# Altium PCB pocker_ shield_2.pcbdoc
Units mm, origin at the board's own origin, x right, y up, seen from the top; angles counter-clockwise.
Board outline 45 x 90.2 mm, 2 copper layers (Top Layer, Bottom Layer); 8 components, 29 nets, 96 pads, 24 vias.
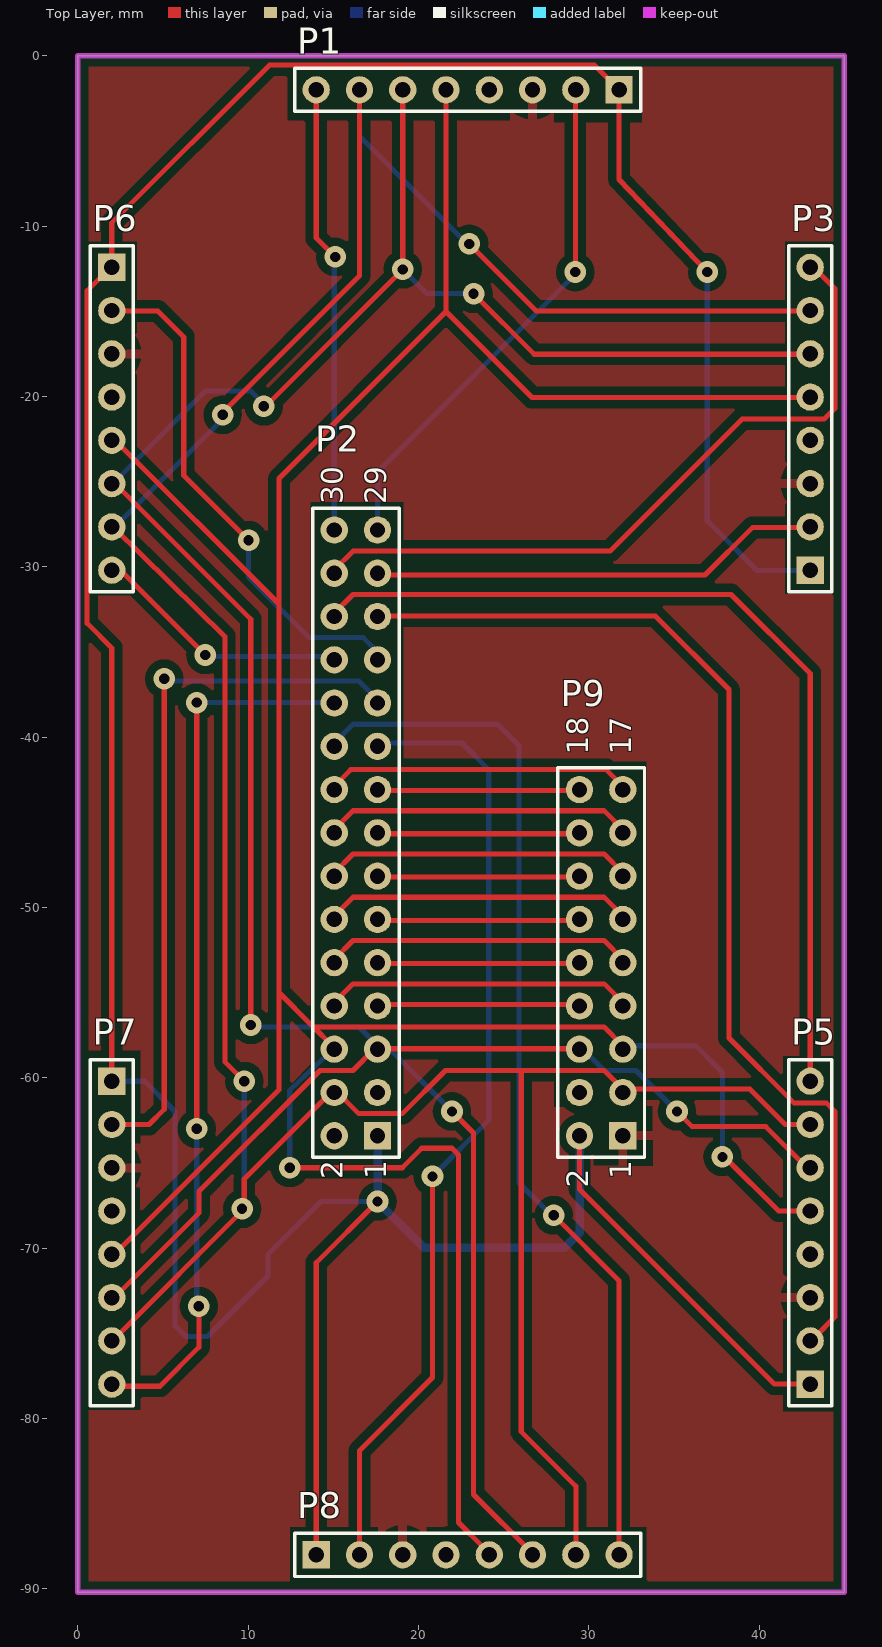
[diagram p0: Top Layer view]
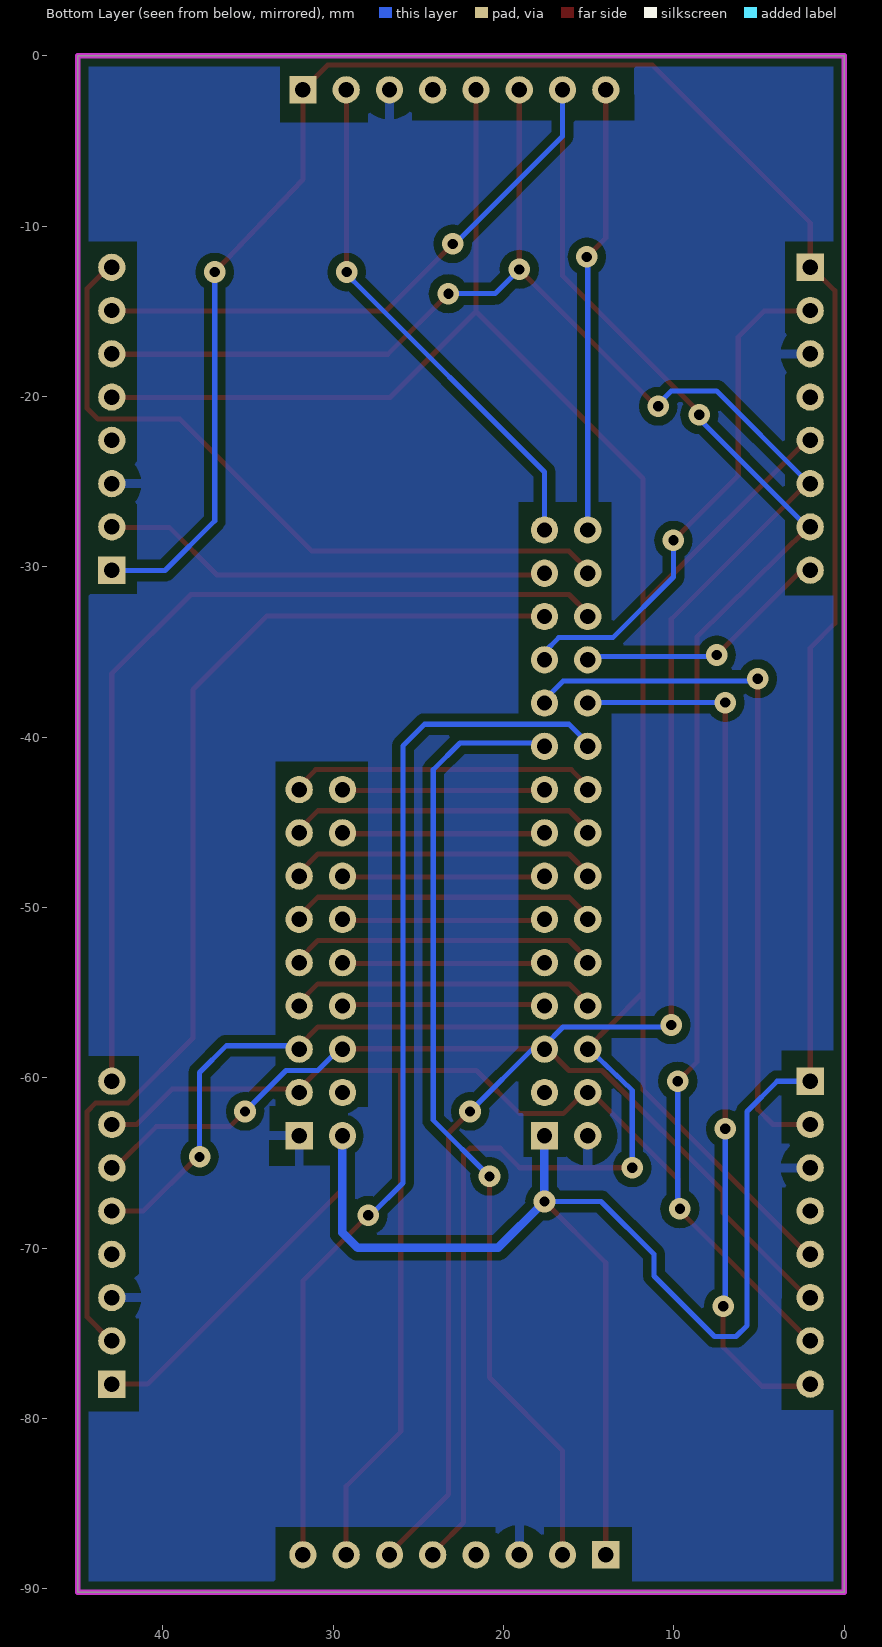
[diagram p1: Bottom Layer view, seen from below]

## Layer stack, top to bottom
Top Solder: solder mask 0.0102, Solder Resist, Dk 3.5
Top Layer: signal copper 0.0356
Dielectric 1: dielectric 0.32, FR-4, Dk 4.8
Bottom Layer: signal copper 0.0356
Bottom Solder: solder mask 0.0102, Solder Resist, Dk 3.5

## Board outline
0,-90.2 0,0 45,0 45,-90.2

## Design rules (kind name [scope] priority, off if disabled: settings)
Clearance [All] p1: gap=0.2
PlaneClearance [All] p1: clearance=0.5
PlaneConnect [All] p1: planeconnectstyle=Relief reliefexpansion=0.508 reliefentries=4 reliefconductorwidth=0.5 reliefairgap=0.5
PolygonConnect [All] p1: connectstyle=Relief reliefconductorwidth=0.5 reliefentries=4 polygonreliefangle="90 Angle" airgapwidth=1
RoutingVias [All] p1: holewidth=0.711 width=1.27 viastyle="Through Hole" minholewidth=0.711 minwidth=1.27 maxholewidth=0.711 maxwidth=1.27
SolderMaskExpansion [All] p1: expansion=0.102
Width [All] p1: maxlimit=0.5 minlimit=0.3 preferedwidth=0.3
27 further rules are at their usual default settings.

## Components (designator, comment, footprint, x,y, rotation, side; value= is the part's Value field where it differs from the comment)
P1 "Header 8" HDR1X8 31.78,-2 r180 top locked
P2 "Header 15X2" HDR2X15 17.6,-63.4 r90 top locked
P3 "Header 8" HDR1X8 43,-30.2 r90 top locked
P5 "Header 8" HDR1X8 43,-77.98 r90 top locked
P6 "Header 8" HDR1X8 2,-12.42 r270 top locked
P7 "Header 8" HDR1X8 2,-60.2 r270 top locked
P8 "Header 8" HDR1X8 14,-88 r0 top locked
P9 "Header 9X2" HDR2X9 32,-63.4 r90 top locked

## Footprints (in the part's own frame and the unit in brackets; to place one, negate y for a bottom-side part, rotate by r counter-clockwise, add the part's x,y. Pads: shape width x height; smd on the part's side, far side on the other; paste and mask are expansions set on the pad)
HDR1X8 [mm] "Connector; Header; 8 Position"
  rect 1.6x1.6 hole 0.9: 1(0,0)
  round 1.6 hole 0.9: 2(2.54,0) 3(5.08,0) 4(7.62,0) 5(10.16,0) 6(12.7,0) 7(15.24,0) 8(17.78,0)
  silkscreen extent -1.27,-1.27 19.05,1.27
HDR2X9 [mm] "Connector; Header; 9x2 Position"
  rect 1.6x1.6 hole 0.9: 1(0,0)
  round 1.6 hole 0.9: 2(0,2.54) 3(2.54,0) 4(2.54,2.54) 5(5.08,0) 6(5.08,2.54) 7(7.62,0) 8(7.62,2.54) 9(10.16,0) 10(10.16,2.54) 11(12.7,0) 12(12.7,2.54) 13(15.24,0) 14(15.24,2.54) 15(17.78,0) 16(17.78,2.54) 17(20.32,0) 18(20.32,2.54)
  silkscreen extent -1.27,-1.27 21.59,3.81
HDR2X15 [mm] "Connector; Header; 15x2 Position"
  rect 1.6x1.6 hole 0.9: 1(0,0)
  round 1.6 hole 0.9: 2(0,2.54) 3(2.54,0) 4(2.54,2.54) 5(5.08,0) 6(5.08,2.54) 7(7.62,0) 8(7.62,2.54) 9(10.16,0) 10(10.16,2.54) 11(12.7,0) 12(12.7,2.54) 13(15.24,0) 14(15.24,2.54) 15(17.78,0) 16(17.78,2.54) 17(20.32,0) 18(20.32,2.54) 19(22.86,0) 20(22.86,2.54) 21(25.4,0) 22(25.4,2.54) 23(27.94,0) 24(27.94,2.54) 25(30.48,0) 26(30.48,2.54) 27(33.02,0) 28(33.02,2.54) 29(35.56,0) 30(35.56,2.54)
  silkscreen extent -1.27,-1.27 36.83,3.81

## Part data
P1 P3 P5 P6 P7 P8: "Header, 8-Pin"
P2: "Header, 15-Pin, Dual row"
P9: "Header, 9-Pin, Dual row"

## Via types
v1: diameter 1.27, hole 0.6, Top Layer to Bottom Layer, 24 vias

## Nets (pads, with @x,y where several pads share a name; then routed paths per layer and width w, separated by ;. In a path a pad name is that pad's centre, name@x,y a point inside that pad or via, vN(x,y) a via of type N, cw(c..) or ccw(c..) an arc to the next point about the centre after c; other vN are vias at no path point)
CS1: P2.8 P9.7 | length 17.8
  Top Layer w0.3: P2.8@15.06,-55.58 16.157,-54.483 30.903,-54.483 P9.7@32,-55.58
CS2: P2.10 P9.9 | length 17.8
  Top Layer w0.3: P2.10@15.06,-53.04 16.157,-51.943 30.903,-51.943 P9.9@32,-53.04
CS3: P2.12 P9.11 | length 17.9
  Top Layer w0.3: P2.12@15.06,-50.5 16.157,-49.403 30.903,-49.403 32,-50.5 P9.11@31.923,-50.5
CS4: P2.14 P9.13 | length 17.9
  Top Layer w0.3: P2.14@15.06,-47.96 16.157,-46.863 30.903,-46.863 32,-47.96 P9.13@31.923,-47.96
CS5: P2.16 P9.15 | length 17.8
  Top Layer w0.3: P2.16@15.06,-45.42 16.157,-44.323 30.903,-44.323 P9.15@32,-45.42
CS6: P2.18 P9.17 | length 17.7
  Top Layer w0.3: P2.18@15.06,-42.88 16.03,-41.91 31.03,-41.91 P9.17@32,-42.88
CS7: P2.20 P8.8 | length 62.2
  Top Layer w0.3: v1(27.94,-68.072) 31.78,-71.912 P8.8
  Bottom Layer w0.3: P2.20@15.06,-40.714 15.06,-40.34 16.157,-39.243 24.638,-39.243 25.908,-40.513 25.908,-66.167 27.813,-68.072 v1(27.94,-68.072)
CS8: P2.22 P7.8 | length 52.2
  Top Layer w0.3: P7.8@2,-77.78 2.325,-78.105 4.826,-78.105 7.112,-75.819 v1(7.112,-73.406) ; v1(6.985,-62.992) v1(6.985,-37.973)
  Bottom Layer w0.3: v1(6.985,-62.992) 6.985,-73.279 v1(7.112,-73.406) ; v1(6.985,-37.973) 14.887,-37.973 P2.22@15.06,-37.8
CS9: P2.24 P6.8 | length 15.2
  Top Layer w0.3: P6.8@2,-30 2.314,-30 v1(7.493,-35.179)
  Bottom Layer w0.3: v1(7.493,-35.179) 7.574,-35.26 P2.24@15.06,-35.26
CS10: P2.26 P5.8 | length 54
  Top Layer w0.3: P2.26@15.06,-32.72 16.157,-31.623 38.354,-31.623 43,-36.269 P5.8@43,-60
CS11: P2.28 P3.8 | length 42.4
  Top Layer w0.3: P2.28@15.06,-30.18 16.157,-29.083 31.242,-29.083 38.989,-21.336 43.815,-21.336 44.446,-20.705 44.446,-13.666 P3.8@43,-12.22
CS12: P1.8 P2.30 | length 26.2
  Top Layer w0.3: P1.8 14,-10.698 v1(15.113,-11.811)
  Bottom Layer w0.3: P2.30 v1@15.06,-11.864
GND: P1.3 P2.2 P3.3 P5.3 P6.3 P7.3 P8.3 P9.1
MISO: P1.5 P2.6 P3.5 P5.5 P6.5 P7.5 P8.5 P9.5 | length 198.2
  Top Layer w0.3: P7.5@2,-70.16 2.357,-70.16 11.811,-60.706 11.811,-24.825 21.62,-15.016 ; P6.5@2,-22.38 11.811,-32.191 ; 11.811,-54.991 13.716,-56.896 ; v1(12.446,-65.278) 19.05,-65.278 20.193,-64.135 21.971,-64.135 22.352,-64.516 22.352,-86.106 23.865,-87.619 P8.5@23.865,-88 ; P2.6@15.286,-58.12 14.94,-58.12 13.843,-57.023 30.903,-57.023 P9.5@32,-58.12 ; P1.5 21.62,-15.016 ; v1@37.973,-64.389 37.973,-64.643 41.148,-67.818 42.802,-67.818 P5.5@43,-67.62 ; P3.5@43,-19.84 42.774,-20.066 26.67,-20.066 21.62,-15.016
  Bottom Layer w0.3: v1(12.446,-65.278) 12.446,-60.734 15.12,-58.183 P2.6@15.187,-58.12 ; P9.5@32,-58.12 36.276,-58.12 37.846,-59.69 37.846,-64.262 v1@38.1,-64.516
  other v1: 37.846,-64.643
MOSI: P1.6 P2.5 P3.6 P5.6 P6.6 P7.6 P8.6 P9.6 | length 187.7
  Top Layer w0.3: P7.6@2,-72.7 2.357,-72.7 7.112,-67.945 7.112,-66.675 14.224,-59.563 16.157,-59.563 17.427,-58.293 29.287,-58.293 P9.6@29.46,-58.12 ; P6.6@2,-24.92 10.16,-33.08 v1@10.16,-57.023 ; v1@10.922,-20.701 v1(19.08,-12.543) P1.6 ; v1(21.971,-61.976) 23.241,-63.246 23.241,-84.455 26.7,-87.914 P8.6 ; v1(23.241,-13.97) 26.797,-17.526 42.774,-17.526 P3.6@43,-17.3 ; v1(35.179,-61.976) 36.068,-62.865 40.386,-62.865 42.601,-65.08 P5.6@43,-65.08
  Bottom Layer w0.3: P6.6@2,-24.92 2.258,-24.92 7.493,-19.685 10.16,-19.685 v1@11.049,-20.574 ; v1@10.16,-57.023 16.51,-57.023 17.6,-58.113 17.6,-58.12 18.115,-58.12 v1(21.971,-61.976) ; v1(19.08,-12.543) 20.507,-13.97 v1(23.241,-13.97) ; P9.6@29.46,-58.12 30.903,-59.563 32.766,-59.563 v1(35.179,-61.976)
  other v1: 10.16,-56.896 10.922,-20.574
RESET1: P2.7 P9.8 | length 11.9
  Top Layer w0.3: P2.7@17.6,-55.707 P9.8@29.464,-55.707
RESET2: P2.9 P9.10 | length 11.9
  Top Layer w0.3: P2.9@17.6,-53.294 P9.10@29.46,-53.294
RESET3: P2.11 P9.12 | length 11.9
  Top Layer w0.3: P2.11@17.727,-50.754 P9.12@29.591,-50.754
RESET4: P2.13 P9.14 | length 11.9
  Top Layer w0.3: P2.13@17.6,-48.214 P9.14@29.46,-48.214
RESET5: P2.15 P9.16 | length 11.9
  Top Layer w0.3: P2.15@17.727,-45.674 P9.16@29.587,-45.674
RESET6: P2.17 P9.18 | length 11.9
  Top Layer w0.3: P2.17@17.727,-43.134 P9.18@29.587,-43.134
RESET7: P2.19 P8.2 | length 56.4
  Top Layer w0.3: P8.2 16.54,-81.885 20.828,-77.597 v1(20.828,-65.786)
  Bottom Layer w0.3: P2.19@17.6,-40.34 22.56,-40.34 24.13,-41.91 24.13,-62.484 v1(20.828,-65.786)
RESET8: P2.21 P7.2 | length 41.8
  Top Layer w0.3: P7.2@2,-62.54 2.198,-62.738 4.191,-62.738 5.08,-61.849 v1(5.08,-36.576)
  Bottom Layer w0.3: v1(5.08,-36.576) 5.207,-36.703 16.503,-36.703 P2.21@17.6,-37.8
RESET9: P2.23 P6.2 | length 30.3
  Top Layer w0.3: P6.2@2,-14.76 2.226,-14.986 4.699,-14.986 6.223,-16.51 6.223,-24.638 v1(10.033,-28.448)
  Bottom Layer w0.3: v1(10.033,-28.448) 10.033,-30.607 13.589,-34.163 16.764,-34.163 17.6,-34.999 P2.23@17.6,-35.26
RESET10: P2.25 P5.2 | length 65
  Top Layer w0.3: P2.25@17.6,-32.72 17.773,-32.893 33.909,-32.893 38.227,-37.211 38.227,-57.658 42.037,-61.468 43.942,-61.468 44.446,-61.972 44.446,-74.045 43.251,-75.24 P5.2@43,-75.24
RESET11: P2.27 P3.2 | length 26.8
  Top Layer w0.3: P2.27@17.6,-30.18 17.9,-30.48 36.83,-30.48 39.624,-27.686 42.774,-27.686 P3.2@43,-27.46
RESET12: P1.2 P2.29 | length 30.5
  Top Layer w0.3: v1@28.829,-12.827 29.21,-12.446 29.21,-2.03 P1.2
  Bottom Layer w0.3: P2.29@17.6,-27.64 17.6,-24.437 28.829,-13.208 v1@28.829,-12.827
  other v1: 29.21,-12.7
SCK: P1.7 P2.4 P3.7 P5.7 P6.7 P7.7 P8.7 P9.3 | length 189
  Top Layer w0.3: P7.7@2,-75.24 2.23,-75.24 9.779,-67.691 9.779,-65.941 15.06,-60.66 16.503,-62.103 19.05,-62.103 21.59,-59.563 26.035,-59.563 ; P6.7@2.127,-27.714 8.636,-34.096 8.636,-59.055 v1@9.906,-60.325 ; v1@8.636,-21.082 8.636,-20.828 16.54,-12.924 P1.7 ; v1(22.987,-11.049) 26.924,-14.986 42.774,-14.986 P3.7@43,-14.76 ; P8.7 29.24,-83.977 26.035,-80.772 26.035,-59.563 ; P5.7@43,-62.54 42.802,-62.738 41.529,-62.738 39.451,-60.66 32,-60.66 30.903,-59.563 26.035,-59.563
  Bottom Layer w0.3: P6.7@2.127,-27.714 v1@8.571,-21.271 ; v1@9.779,-67.437 v1(9.779,-60.198) ; P1.7 16.54,-4.729 22.86,-11.049 v1(22.987,-11.049)
  other v1: 9.652,-67.691 8.509,-21.082
VDD+3.3V: P1.1 P2.1 P3.1 P5.1 P6.1 P7.1 P8.1 P9.2 | length 220.9
  Top Layer w0.3: P7.1@2,-60 2,-34.766 0.554,-33.32 0.554,-13.797 2,-12.351 2,-9.811 11.257,-0.554 30.334,-0.554 P1.1 31.78,-7.269 v1(36.957,-12.7) ; P8.1 14,-70.857 v1(17.6,-67.257) ; P9.2@29.46,-63.2 29.46,-66.544 40.894,-77.978 42.802,-77.978 P5.1@43,-77.78 ; P3.1@42.972,-29.972 P3.1@43,-30
  Bottom Layer w0.3: P7.1@2,-60 2.198,-60.198 3.937,-60.198 5.715,-61.976 5.715,-74.549 6.35,-75.184 7.62,-75.184 11.176,-71.628 11.176,-70.358 14.277,-67.257 v1(17.6,-67.257) ; v1(36.957,-12.7) 36.957,-27.305 39.878,-30.226 42.774,-30.226 P3.1@43,-30
  Bottom Layer w0.5: P2.1@17.6,-63.2 v1(17.6,-67.257) 20.32,-69.977 28.575,-69.977 29.46,-69.092 P9.2@29.46,-63.2
pads on no net: P1.4 P2.3 P3.4 P5.4 P6.4 P7.4 P8.4 P9.4
copper on no net: | length 0.5
  Top Layer w0.3: 29.46,-60.66 29.926,-60.66

## Polygon pours and split planes (outlines as drawn)
GND on Bottom Layer "Bottom Layer-No Net" (solid, pour order 4): 0,0 45,0 45,-90.2 0,-90.2
GND on Top Layer "Bottom Layer-No Net" (solid, pour order 6): 0,0 45,0 45,-90.2 0,-90.2

## Keep-outs
Keep-Out Layer:
  the board outline again, w0.3

## Other copper
Multi-Layer:
  pour cut-out: 27.94,-41.402 33.401,-41.402 33.401,-61.722 27.94,-61.722
  pour cut-out: 12.446,-86.36 17.653,-86.36 17.653,-89.789 12.446,-89.789
  pour cut-out: 0.508,-58.381 3.708,-58.381 3.708,-63.881 0.508,-63.881
  pour cut-out: 27.94,-0.508 33.147,-0.508 33.147,-3.937 27.94,-3.937
  pour cut-out: 12.319,-0.381 25.4,-0.508 25.4,-3.81 12.3,-3.821
  pour cut-out: 41.5,-10.9 44.5,-10.9 44.5,-23.9 41.6,-23.9 41.5,-23.8
  pour cut-out: 41.5,-26.3 44.5,-26.3 44.5,-31.57 44.361,-31.709 44.251,-31.6 41.5,-31.6
  pour cut-out: 41.4,-58.7 44.5,-58.7 44.5,-71.8 41.7,-71.8 41.4,-71.5
  pour cut-out: 41.4,-74.1 44.6,-74.1 44.6,-79.6 41.4,-79.6
  pour cut-out: 20.447,-86.36 33.401,-86.36 33.4,-89.9 33.3,-89.8 20.447,-89.789
  pour cut-out: 0.381,-66.421 3.683,-66.421 3.7,-79.5 0.5,-79.5 0.4,-79.6
  pour cut-out: 0.5,-18.7 3.5,-18.7 3.5,-31.7 0.5,-31.7
  pour cut-out: 0.5,-10.9 3.5,-10.9 3.5,-16.3 0.5,-16.3
  pour cut-out: 13.643,-26.189 19.143,-26.189 19.143,-62.089 13.643,-62.089

## Text inside footprints (layer, text, board x,y; h text height)
P2: Top Overlay "1" at 18.108,-65.94 h1.27 r90; Top Overlay "2" at 15.568,-65.94 h1.27 r90; Top Overlay "29" at 18.108,-26.316 h1.27 r90; Top Overlay "30" at 15.568,-26.316 h1.27 r90
P9: Top Overlay "18" at 29.968,-41.048 h1.27 r90; Top Overlay "17" at 32.508,-41.048 h1.27 r90; Top Overlay "1" at 32.508,-65.94 h1.27 r90; Top Overlay "2" at 29.968,-66.448 h1.27 r90